# Altium PCB BLEAIRNOUSE20161227-AD.PcbDoc
Units mil, origin at the board's own origin, x right, y up, seen from the top; angles counter-clockwise.
Board outline 1188.98 x 307.09 mil, 2 copper layers (Top, Bottom), stack 12.7 mil thick; 72 components, 42 nets, 224 pads, 2 vias.
Unrouted connection lines stored in the file: 131.
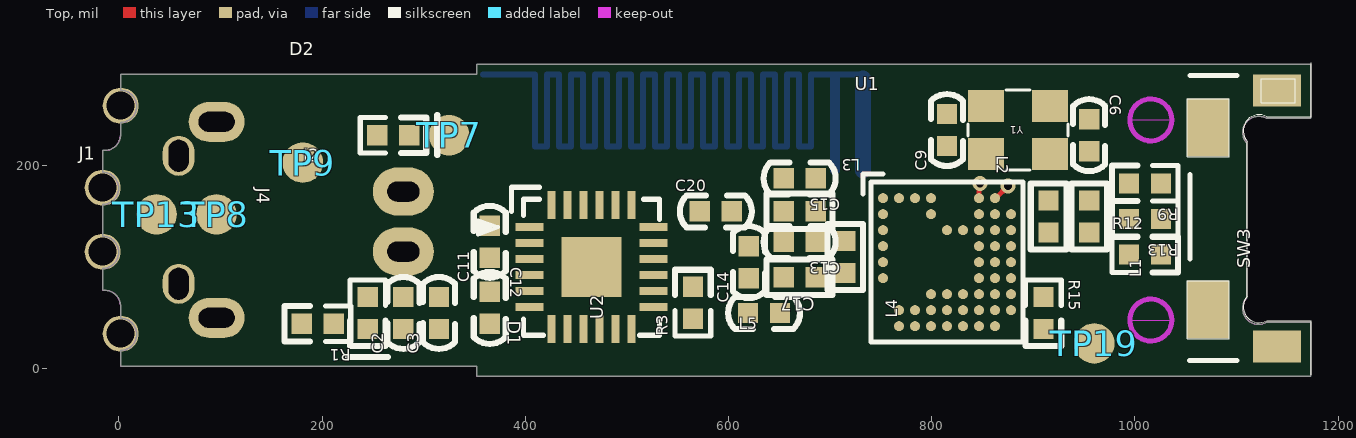
[diagram p0: Top view]
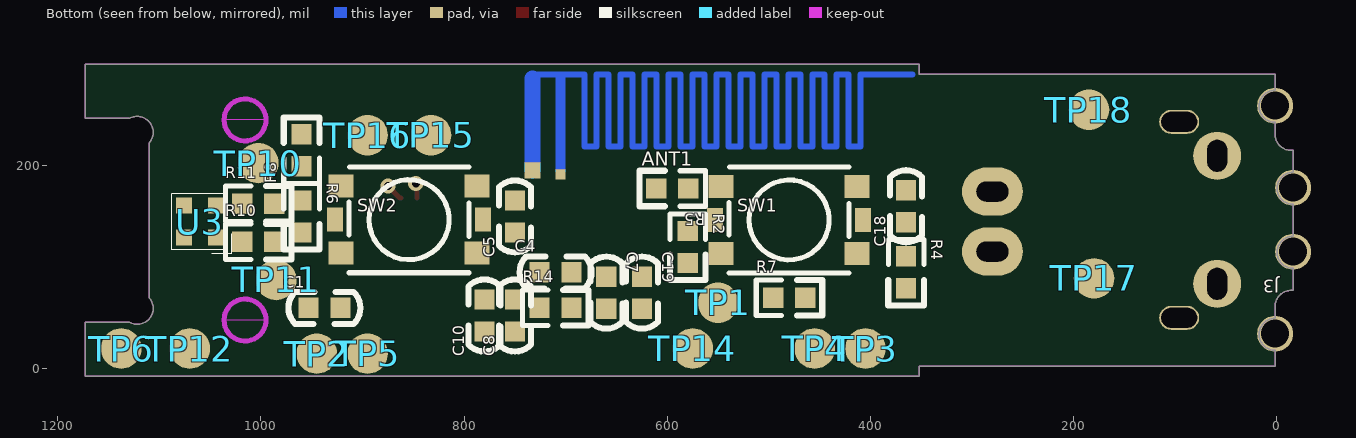
[diagram p1: Bottom view, seen from below]

## Layer stack, top to bottom
Solder Mask Top: solder mask 0.4, Solder Resist, Dk 3.5
Top: signal copper 1.35
Dielectric 1: dielectric 10, FR-4, Dk 4.3
Bottom: signal copper 1.35
Solder Mask Bottom: solder mask 0.4, Solder Resist, Dk 3.5

## Board outline
-14,215 ccw(c-14,230.75) 1.75,230.75 1.75,242.56 ccw(c1.75,258.31) 1.75,274.06 1.75,289.8 352.14,289.8 352.14,299.65 1173.01,299.65 1173.01,246.5 1129.45,246.5 1129.46,246.49 ccw(c1121.83,232.72) 1110.02,222.3 1110.02,69.9 1110.01,69.9 ccw(c1121.83,59.49) 1129.45,45.71 1173.01,45.71 1173.01,-7.44 352.14,-7.44 352.14,2.4 1.75,2.4 1.75,18.15 ccw(c1.75,33.9) 1.75,49.65 1.75,61.46 ccw(c-14,61.46) -14,77.2 -15.97,77.2 -15.97,98.86 ccw(c-15.97,114.61) -15.97,130.35 -15.97,161.85 ccw(c-15.97,177.6) -15.97,193.35 -15.97,215

## Design rules (kind name [scope] priority, off if disabled: settings)
Clearance "Clearance - Default - DEFAULT- SMD" [IsVia vs IsSMTPin] p1: gap=6
Clearance "Clearance - Default - DEFAULT - Via" [IsVia vs IsVia] p2: gap=6
Clearance "Clearance - Default - DEFAULT - Net" [All] p3: gap=6 except(10: Text-Text)
ComponentClearance "ComponentClearance - Default - DEFAULT" [All] p1: gap=6 collisioncheckmode=3 verticalgap=10 showdistances=FALSE
FanoutControl Fanout_Small [(CompPinCount < 5)] p3: bgadir=Out bgaviamode=Centered fanoutstyle=Auto fanoutdirection=OutThenIn viagrid=1 // Fanout_Small (Default Rule)
FanoutControl Fanout_SOIC [IsSOIC] p4: bgadir=Out bgaviamode=Centered fanoutstyle=Auto fanoutdirection=Alternating viagrid=1 // Fanout_SOIC (Default Rule)
HoleToHoleClearance "HoleToHoleClearance - Default - DEFAULT" [All] p1: gap=6 allowstackedmicrovias=TRUE
Length "Default Length" [All] p1: maxlimit=50000 minlimit=0
MaxMinImpedance "Default Impedance" [All] p1: minimum=50.00 maximum=150.0
ParallelSegment "Default Parallel Segment Adjasent" [All] p1: limit=1000 gap=200
ParallelSegment "Default Parallel Segment Same Layer" [All] p2: limit=1000 gap=200
PlaneConnect "Default PlaneConnect" [All] p1: planeconnectstyle=Relief reliefexpansion=20 reliefentries=0 reliefconductorwidth=15 reliefairgap=10
PolygonConnect "PolygonConnect - Default SMT" [IsSMTPin] p1: connectstyle=Relief reliefconductorwidth=10 reliefentries=4 polygonreliefangle="45 Angle" airgapwidth=10
PolygonConnect "PolygonConnect - Default Pad" [All] p2: connectstyle=Relief reliefconductorwidth=15 reliefentries=4 polygonreliefangle="45 Angle" airgapwidth=10
RoutingLayers "RoutingLayers - Default - DEFAULT" [All] p1: top layer_v5=TRUE bottom layer_v5=TRUE
RoutingPriority "RoutingPriority - Default - DEFAULT" [All] p1: routingpriority=3
RoutingTopology "Default Routing Topology" [All] p1: topology=Shortest
RoutingVias "RoutingVias - Default - DEFAULT" [All] p1: holewidth=8 width=15 viastyle="Through Hole" minholewidth=8 minwidth=15 maxholewidth=8 maxwidth=15
SMDToCorner "SMDToCorner - Default - DEFAULT" [All] p1: distance=60000
SolderMaskExpansion [All] p1: expansion=4
Width "Default Width" [All] p1: maxlimit=100 minlimit=5 preferedwidth=5
22 further rules are at their usual default settings.

## Components (designator, comment, footprint, x,y, rotation, side; value= is the part's Value field where it differs from the comment)
ANT1 "ANT_PIFA_2G4_UPDATED_0MM6" ANT_PIFA_2G4_UPDATED_0MM6 705,195 r180 bottom
C1 "C0402B" C0402B 937.5,60 r180 bottom
C2 "C0402B" C0402B 280,55 r90 top
C3 "C0402B" C0402B 315,55 r90 top
C4 "C0402B" C0402B 710,95 r180 bottom
C5 "C0402B" C0402B 750,150 r90 bottom
C6 "C0402B" C0402B 955,230 r270 top
C7 "C0402B" C0402B 660,75 r270 bottom
C8 "C0402B" C0402B 750,52.5 r90 bottom
C9 "C0402B" C0402B 815,235 r90 top
C10 "C0402B" C0402B 780,52.5 r90 bottom
C11 "C0402B" C0402B 365,125 r90 top
C12 "C0402B" C0402B 365,60 r270 top
C13 "C0402B" C0402B 670,125 r180 top
C14 "C0402B" C0402B 620,105 r90 top
C15 "C0402B" C0402B 670,187.5 r180 top
C17 "C0402B" C0402B 635,55 r180 top
C18 "C0402B" C0402B 365,160 r90 bottom
C19 "C0402B" C0402B 625,75 r270 bottom
C20 "C0402B" C0402B 587.5,155 r0 top
D1 "SOD723" SOD723 245,55 r270 top
D2 "SOD723" SOD723 270,230 r0 top
J1 "BAT+" BAT+ 58.8,146.7 r0 top
J2 "BAT-" BAT- 280,145 r0 top
J3 "BAT-JC" BAT-JC 96.2,146.65 r0 bottom
J4 "DIP4-2_0A" DIP4-2_0A -15.94,146.75 r270 top
L1 "L0402B" L0402B 955,150 r90 top
L2 "L0402B" L0402B 915,150 r270 top
L3 "L0402B" L0402B 670,155 r180 top
L4 "L0402B" L0402B 715,110 r90 top
L5 "L0402B" L0402B 670,90 r0 top
R1 "R0402" R0402 195.67,44.38 r180 top
R2 "R0402" R0402 580,120 r270 bottom
R3 "R0402" R0402 565,65 r90 top
R4 "R0402" R0402 365,95 r270 bottom
R5 "R0402" R0402 595,177.5 r0 bottom
R6 "R0402" R0402 960,150 r270 bottom
R7 "R0402" R0402 480,70 r180 bottom
R8 "R0402" R0402 960,215 r90 bottom
R9 "R0402" R0402 1010,182.5 r180 top
R10 "R0402" R0402 1002.5,125 r180 bottom
R11 "R0402" R0402 1002.5,162.5 r180 bottom
R12 "R0402" R0402 1010,112.5 r0 top
R13 "R0402" R0402 1010,147.5 r180 top
R14 "R0402" R0402 710,60 r180 bottom
R15 "R0402" R0402 910,55 r270 top
SW1 "SW-3_5X2_7-SMD" SW-3_5X2_7-SMD 480.12,146.57 r180 bottom
SW2 "SW-3_5X2_7-SMD" SW-3_5X2_7-SMD 854.13,146.77 r180 bottom
SW3 "EVQP4" EVQP4 1072.05,147.95 r90 top
TP1 "TP-1MM" TP-1MM 550,65 r180 bottom
TP2 "TP-1MM" TP-1MM 945,15 r180 bottom
TP3 "TP-1MM" TP-1MM 405,20 r180 bottom
TP4 "TP-1MM" TP-1MM 455,20 r180 bottom
TP5 "TP-1MM" TP-1MM 895,15 r180 bottom
TP6 "TP-1MM" TP-1MM 1137.5,20 r180 bottom
TP7 "TP-1MM" TP-1MM 325,230 r0 top
TP8 "TP-1MM" TP-1MM 96,152 r0 top
TP9 "TP-1MM" TP-1MM 181,203 r0 top
TP10 "TP-1MM" TP-1MM 1002.5,202.5 r180 bottom
TP11 "TP-1MM" TP-1MM 985,87.5 r180 bottom
TP12 "TP-1MM" TP-1MM 1070,20 r180 bottom
TP13 "TP-1MM" TP-1MM 37,152 r0 top
TP14 "TP-1MM" TP-1MM 575,20 r180 bottom
TP15 "TP-1MM" TP-1MM 832.5,230 r180 bottom
TP16 "TP-1MM" TP-1MM 895,230 r180 bottom
TP17 "TP-1MM" TP-1MM 180,89 r180 bottom
TP18 "TP-1MM" TP-1MM 185,255 r180 bottom
TP19 "TP-1MM" TP-1MM 960,25 r0 top
U1 "NRF51822WLCSP" NRF51822WLCSP 815,105 r0 top
U2 "QFN24-3X3" QFN24-3X3 465,100 r90 top
U3 "LED_RGB_1MMX1MM" LED_RGB_1MMX1MM 1060,145 r180 bottom
Y1 "X2520" X2520 885,235 r180 top

## Footprints (in the part's own frame and the unit in brackets; to place one, negate y for a bottom-side part, rotate by r counter-clockwise, add the part's x,y. Pads: shape width x height; smd on the part's side, far side on the other; paste and mask are expansions set on the pad)
ANT_PIFA_2G4_UPDATED_0MM6 [mm]
  rrect0% 0.25x0.25 smd: 1(0,-0.1)
  rect 0.4x0.4 smd: 2(-0.7,0)
  Top lines w0.15: 8.8,2.4 7.8,2.4 7.5,2.4 7.5,0.6 7.2,0.6 7.2,2.4 6.9,2.4 6.9,0.6 6.6,0.6 6.6,2.4 6.3,2.4 6.3,0.6 6,0.6 6,2.4 5.7,2.4 5.7,0.6 5.4,0.6 5.4,2.4 5.1,2.4 5.1,0.6 4.8,0.6 4.8,2.4 4.5,2.4 4.5,0.6 4.2,0.6 4.2,2.4 3.9,2.4 3.9,0.6 3.6,0.6 3.6,2.4 3.3,2.4 3.3,0.6 3,0.6 3,2.4 2.7,2.4 2.7,0.6 2.4,0.6 2.4,2.4 2.1,2.4 2.1,0.6 1.8,0.6 1.8,2.4 1.5,2.4 1.5,0.6 1.2,0.6 1.2,2.4 0.9,2.4 0.9,0.6 0.6,0.6 0.6,2.4 0,2.4 ; 0,0 0,2.4 ; -0.7,2.4 0,2.4
  Top lines w0.25: 0,0 0,2.3
  Top lines w0.4: -0.7,0 -0.7,2.3
BAT+ [mm]
  oval 0.8x1 / inner oval 0.8x1 / far side rrect100% 1.2x1.2 hole 0.5 slot 0.8 at 90 deg: 1(0,1.6) 2(0,-1.6)
BAT- [mm]
  oval 1.524x1.2 hole 0.5 slot 0.8 at 0 deg: 1(0,0.75) 2(0,-0.75)
BAT-JC [mm]
  oval 1x0.6 / inner oval 1x0.6 / far side oval 1.4x1 hole 0.5 slot 0.9 at 0 deg: 1(0,2.45) 2(0,-2.45)
C0402B [mil]
  rect 20x20 smd: 1(-15.75,0) 2(15.75,0)
  silkscreen extent -35,-16 35,16
DIP4-2_0A [mm]
  round 0.9 hole 0.7: 1(2.85,0.45) 2(0.8,0) 3(-0.8,0) 4(-2.85,0.45)
EVQP4 [mm]
  rect 1.45x1.05 smd: 1(-2.275,0) 2(2.275,0)
  rect 0.8x1.2 smd: 3(-3.2,-1.725) 4(3.2,-1.725)
  silkscreen extent -3.91,-2.58 3.9,0.53
L0402B [mil]
  rect 20x20 smd: 1(-15.75,0) 2(15.75,0)
  silkscreen extent -32,-18 32,18
LED_RGB_1MMX1MM [mm]
  rect 0.4x0.4 smd: 1(0.4,-0.4) 2(0.4,0.4) 3(-0.4,0.4) 4(-0.4,-0.4)
  silkscreen extent -0.7,-0.8 0.8,0.7
NRF51822WLCSP [mm]
  round 0.25 smd: A1(-1.6,1.6) A2(-1.2,1.6) A3(-0.8,1.6) A4(-0.4,1.6) A7(0.8,1.6) A8(1.2,1.6) B1(-1.6,1.2) B4(-0.4,1.2) B7(0.8,1.2) B8(1.2,1.2) B9(1.6,1.2) C1(-1.6,0.8) C5(0,0.8) C6(0.4,0.8) C7(0.8,0.8) C8(1.2,0.8) C9(1.6,0.8) D1(-1.6,0.4) D7(0.8,0.4) D8(1.2,0.4) D9(1.6,0.4) E1(-1.6,0) E7(0.8,0) E8(1.2,0) E9(1.6,0) F1(-1.6,-0.4) F7(0.8,-0.4) F8(1.2,-0.4) F9(1.6,-0.4) G4(-0.4,-0.8) G5(0,-0.8) G6(0.4,-0.8) G7(0.8,-0.8) G8(1.2,-0.8) G9(1.6,-0.8) H2(-1.2,-1.2) H3(-0.8,-1.2) H4(-0.4,-1.2) H5(0,-1.2) H6(0.4,-1.2) H7(0.8,-1.2) H8(1.2,-1.2) H9(1.6,-1.2) J2(-1.2,-1.6) J3(-0.8,-1.6) J4(-0.4,-1.6) J5(0,-1.6) J6(0.4,-1.6) J7(0.8,-1.6) J8(1.2,-1.6)
  round 0 all layers, no hole: A5(0,0) A6(0,0) B5(0,0) B6(0,0) E2(0,0) E3(0,0) F2(0,0) F3(0,0) G1(0,0) G2(0,0) G3(0,0) H1(0,0)
  silkscreen extent -2.1,-2 1.9,2.2
QFN24-3X3 [mm]
  rect 0.2x0.7 smd: 1(1,1.55) 2(0.6,1.55) 3(0.2,1.55) 4(-0.2,1.55) 5(-0.6,1.55) 6(-1,1.55) 13(-1,-1.55) 14(-0.6,-1.55) 15(-0.2,-1.55) 16(0.2,-1.55) 17(0.6,-1.55) 18(1,-1.55)
  rect 0.7x0.2 smd: 7(-1.55,1) 8(-1.55,0.6) 9(-1.55,0.2) 10(-1.55,-0.2) 11(-1.55,-0.6) 12(-1.55,-1) 19(1.55,-1) 20(1.55,-0.6) 21(1.55,-0.2) 22(1.55,0.2) 23(1.55,0.6) 24(1.55,1)
  rect 1.5x1.5 smd: 25(0,0)
  silkscreen extent -1.7,-1.7 2,2.83
R0402 [mil]
  rect 20x20 smd: 1(-15.75,0) 2(15.75,0)
  silkscreen extent -32,-18 32,18
SOD723 [mil]
  rect 20x20 smd: 1(-15.75,0) 2(15.75,0)
  silkscreen extent -32,-20 43,20
SW-3_5X2_7-SMD [mm]
  rect 0.625x0.575 smd: 1(-1.7,0.837) 2(-1.7,-0.837) 3(1.7,0.837) 4(1.7,-0.837)
  rect 0.4x0.6 smd: 5(1.85,0) 6(-1.85,0)
  silkscreen extent -1.51,-1.33 1.5,1.32
TP-1MM [mil]
  round 40 smd: 1(0,0)
X2520 [mm]
  rect 0.9x0.8 smd: 1(-0.8,-0.6) 2(0.8,-0.6) 3(0.8,0.6) 4(-0.8,0.6)
  silkscreen extent -1.25,-1 1.25,1

## Via types
v1: diameter 15, hole 8, Top to Bottom, 2 vias

## Nets (pads, with @x,y where several pads share a name; then routed paths per layer and width w, separated by ;. In a path a pad name is that pad's centre, name@x,y a point inside that pad or via, vN(x,y) a via of type N, cw(c..) or ccw(c..) an arc to the next point about the centre after c; other vN are vias at no path point)
ANT1: L4.1 L5.2 U1.D1
ANT2: C13.1 L4.2 U1.C1
AREF0: R12.1 R13.2 U1.C9
AVDD: C1.1 L1.2 U1.A1
B_LED: R11.2 TP10.1 U1.J4
G_LED: R10.2 TP11.1 U1.H4
GND: C1.2 C2.2 C3.2 C4.2 C5.2 C6.2 C7.2 C8.2 C9.2 C10.2 C11.2 C12.2 C14.1 C15.2 C17.2 C18.2 C19.2 C20.2 D1.1 J2.1 J2.2 R1.1 R7.2 R8.2 R13.1 R14.2 TP17.1 U1.B1 U1.B4 U1.C8 U1.D7 U1.G6 U1.G9 U1.H3 U2.1 U2.11 U2.18 U2.25 Y1.2 Y1.4
I2C_SCL: R3.2 TP1.1 U1.E9 U2.23
I2C_SDA: R2.2 TP2.1 U1.F8 U2.24
INT_MPU6050: TP4.1 U1.F9 U2.12
KEY0: R5.2 TP5.1 U1.J8
KEY1: R6.2 TP6.1 U1.H6
KEY2: R15.2 TP19.1 U1.J5
N756550: C11.1 R4.2 U2.8
N756642: C12.1 U2.10
N760581: R5.1 R7.1 SW1.1
N760880: R6.1 R8.1 SW2.1
N770152: TP3.1 U2.9
N772398: C4.1 U1.F1
N772402: C5.1 U1.A4
N772486: TP16.1 U1.A8 | length 17.7
  Top w5: U1.A8 862.99,167.99 v1(875,180)
N774070: L1.1 L2.2
N774429: L2.1 U1.B9
N780506: D2.1 J3.1 J3.2
N781791: R9.1 U3.4
N786255: ANT1.1 C15.1 L3.1
N786271: C13.2 C14.2 L3.2
N793028: R10.1 U3.3
N793032: R11.1 U3.2
N795092: TP15.1 U1.A7 | length 14.9
  Top w5: U1.A7 846.5,181.5 v1(847.5,182.5)
N796039: C20.1 U2.20
N798202: R14.1 R15.1 SW3.1
P05: J4.1 TP14.1 U1.H9
P06: J4.2 TP13.1 U1.G8
R_LED: R9.2 TP12.1 U1.H5
SWDCLK: J4.4 R1.2 TP9.1 U1.H2
SWDIO: J4.3 TP8.1 U1.J2
VBAT_DECT: D2.2 TP7.1 U1.D9
VDD_NRF: C2.1 C3.1 C7.1 C8.1 C10.1 C18.1 C19.1 D1.2 J1.1 J1.2 R2.1 R3.1 R4.1 R12.2 SW1.2 SW2.2 SW3.2 TP18.1 U1.B8 U1.H8 U2.13 U3.1
VDD_PA: C17.1 L5.1 U1.E1
XC1: C9.1 U1.A2 Y1.3
XC2: C6.1 U1.A3 Y1.1
pads on no net: ANT1.2 SW1.3 SW1.4 SW1.5 SW1.6 SW2.3 SW2.4 SW2.5 SW2.6 SW3.3 SW3.4 U1.A5 U1.A6 U1.B5 U1.B6 U1.B7 U1.C5 U1.C6 U1.C7 U1.D8 U1.E2 U1.E3 U1.E7 U1.E8 U1.F2 U1.F3 U1.F7 U1.G1 U1.G2 U1.G3 U1.G4 U1.G5 U1.G7 U1.H1 U1.H7 U1.J3 U1.J6 U1.J7 U2.2 U2.3 U2.4 U2.5 U2.6 U2.7 U2.14 U2.15 U2.16 U2.17 U2.19 U2.21 U2.22

## Keep-outs
Keep-Out Layer:
  circle w5: c1015.67,245 r20.67
  circle w5: c1015.67,48 r20.67
  lines w1: 995,48 1036.34,48 ; 995,245 1036.34,245 ; -15.97,77.2 -14,77.2 cw(c-14,61.46) 1.75,61.46 1.75,49.65 cw(c1.75,33.9) 1.75,18.15 1.75,2.4 352.14,2.4 352.14,-7.44 1173.01,-7.44 1173.01,45.71 1129.45,45.71 cw(c1121.83,59.49) 1110.01,69.9 1110.02,222.3 cw(c1121.83,232.72) 1129.46,246.49 1173.01,246.5 1173.01,299.65 352.14,299.65 352.14,289.8 1.75,289.8 1.75,274.06 cw(c1.75,258.31) 1.75,242.56 1.75,230.75 cw(c-14,230.75) -14,215 -15.97,215 -15.97,193.35 cw(c-15.97,177.6) -15.97,161.85 -15.97,130.35 cw(c-15.97,114.61) -15.97,98.86 -15.97,77.2

## Silkscreen, mask and mechanical layers (free items; w line width, h text height)
Assembly Drawing Top:
  drawing of 3792 lines, arcs and shapes, not listed
Assembly Drawing Bottom:
  drawing of 10724 lines, arcs and shapes, not listed